# Altium PCB PCB2.PcbDoc (part 1 of 2)
Units mm, origin at the board's own origin, x right, y up, seen from the top; angles counter-clockwise.
Board outline 57.97 x 94.13 mm, 2 copper layers (Top Layer, Bottom Layer); 87 components, 62 nets, 335 pads, 103 vias.
Unrouted connection lines stored in the file: 22.
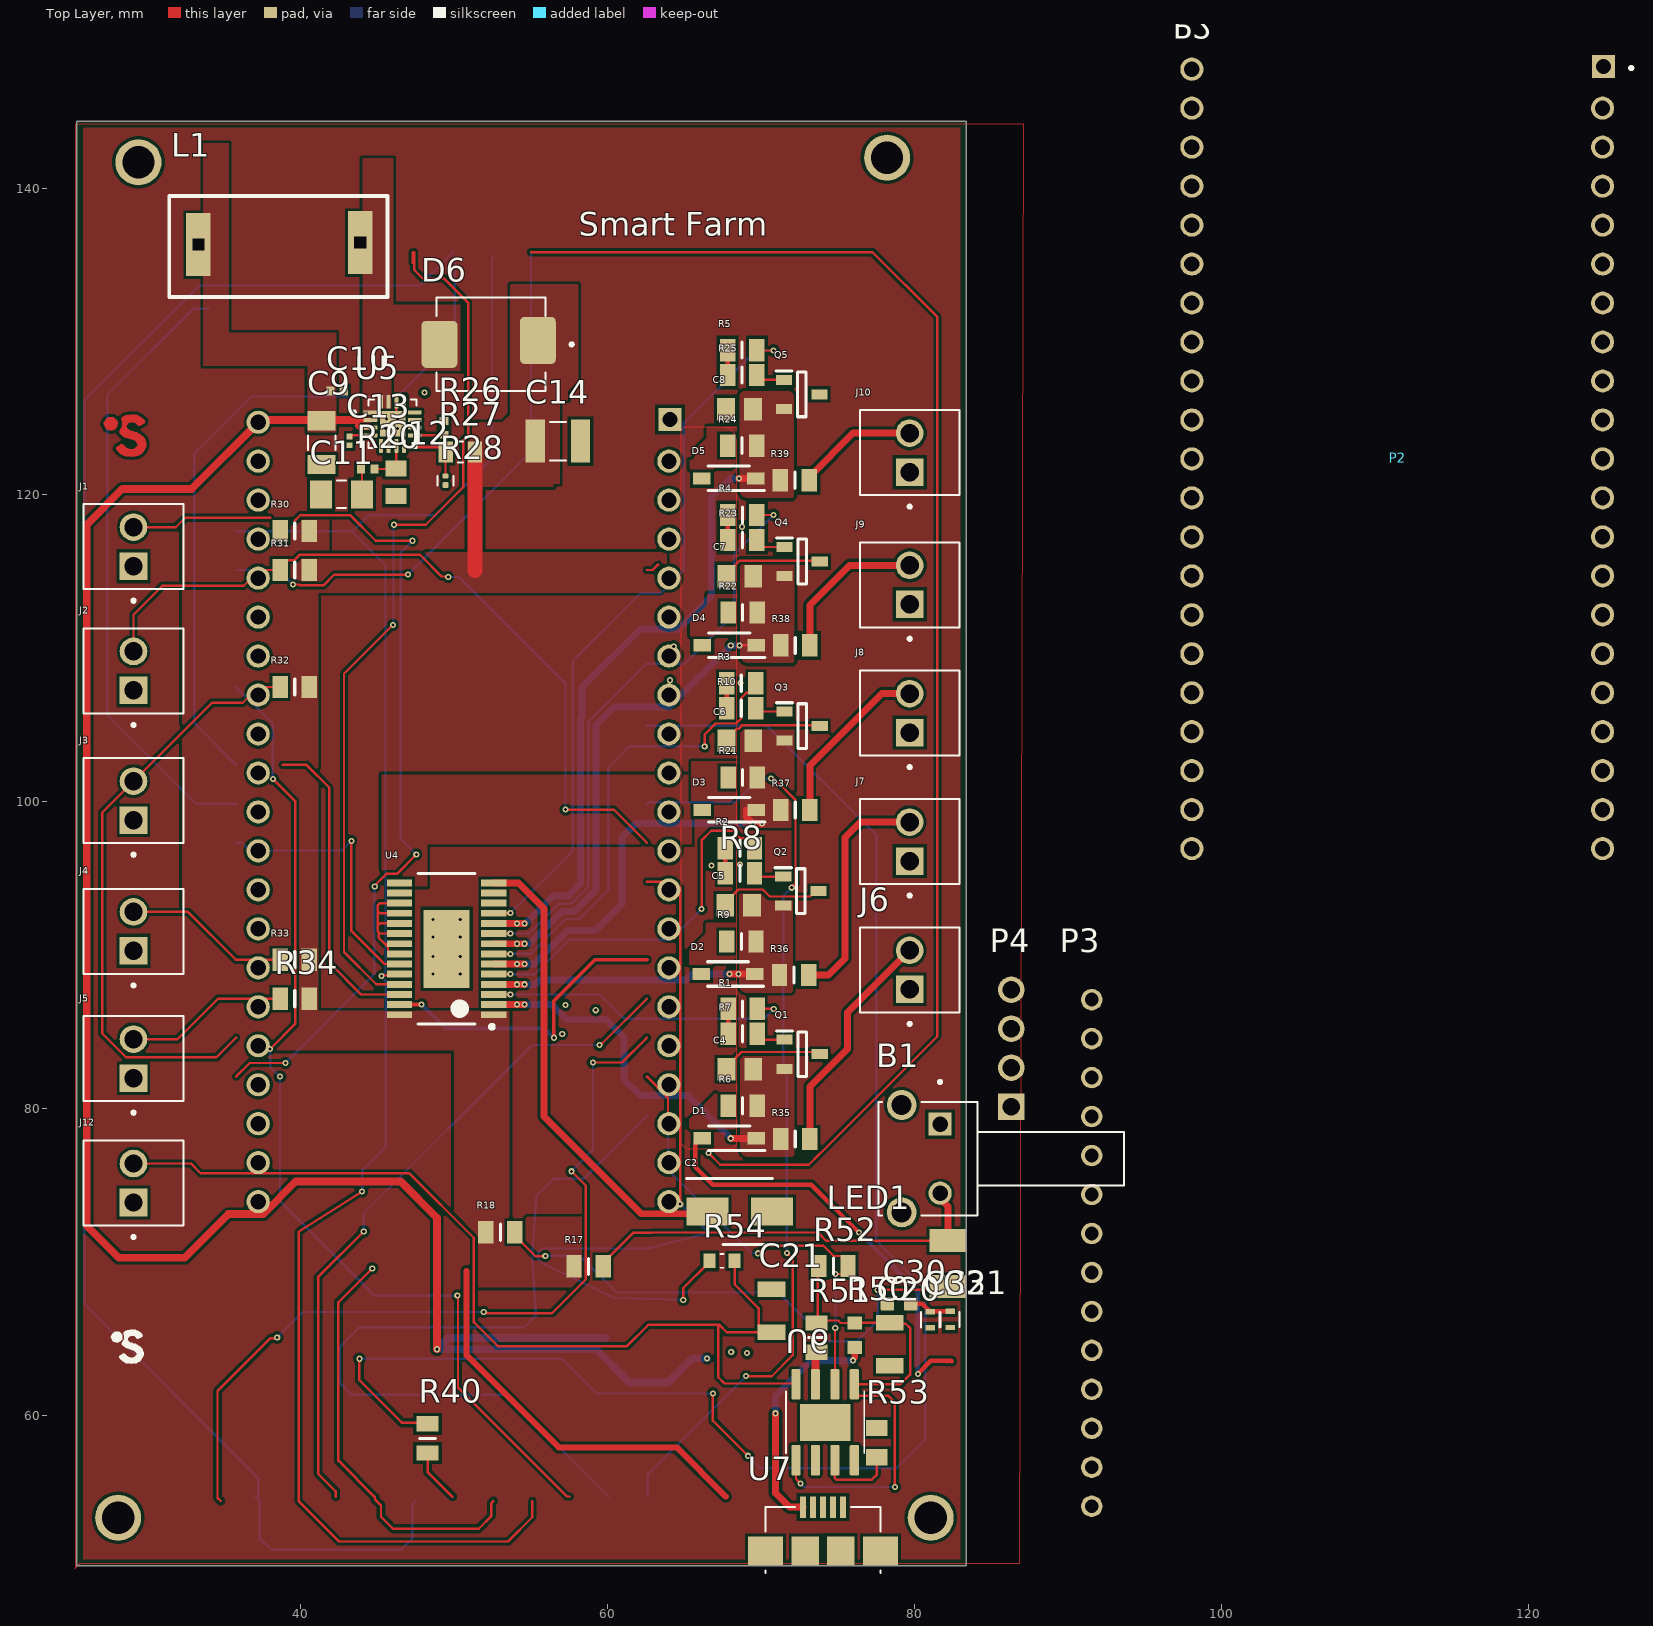
[diagram p0: Top Layer view]
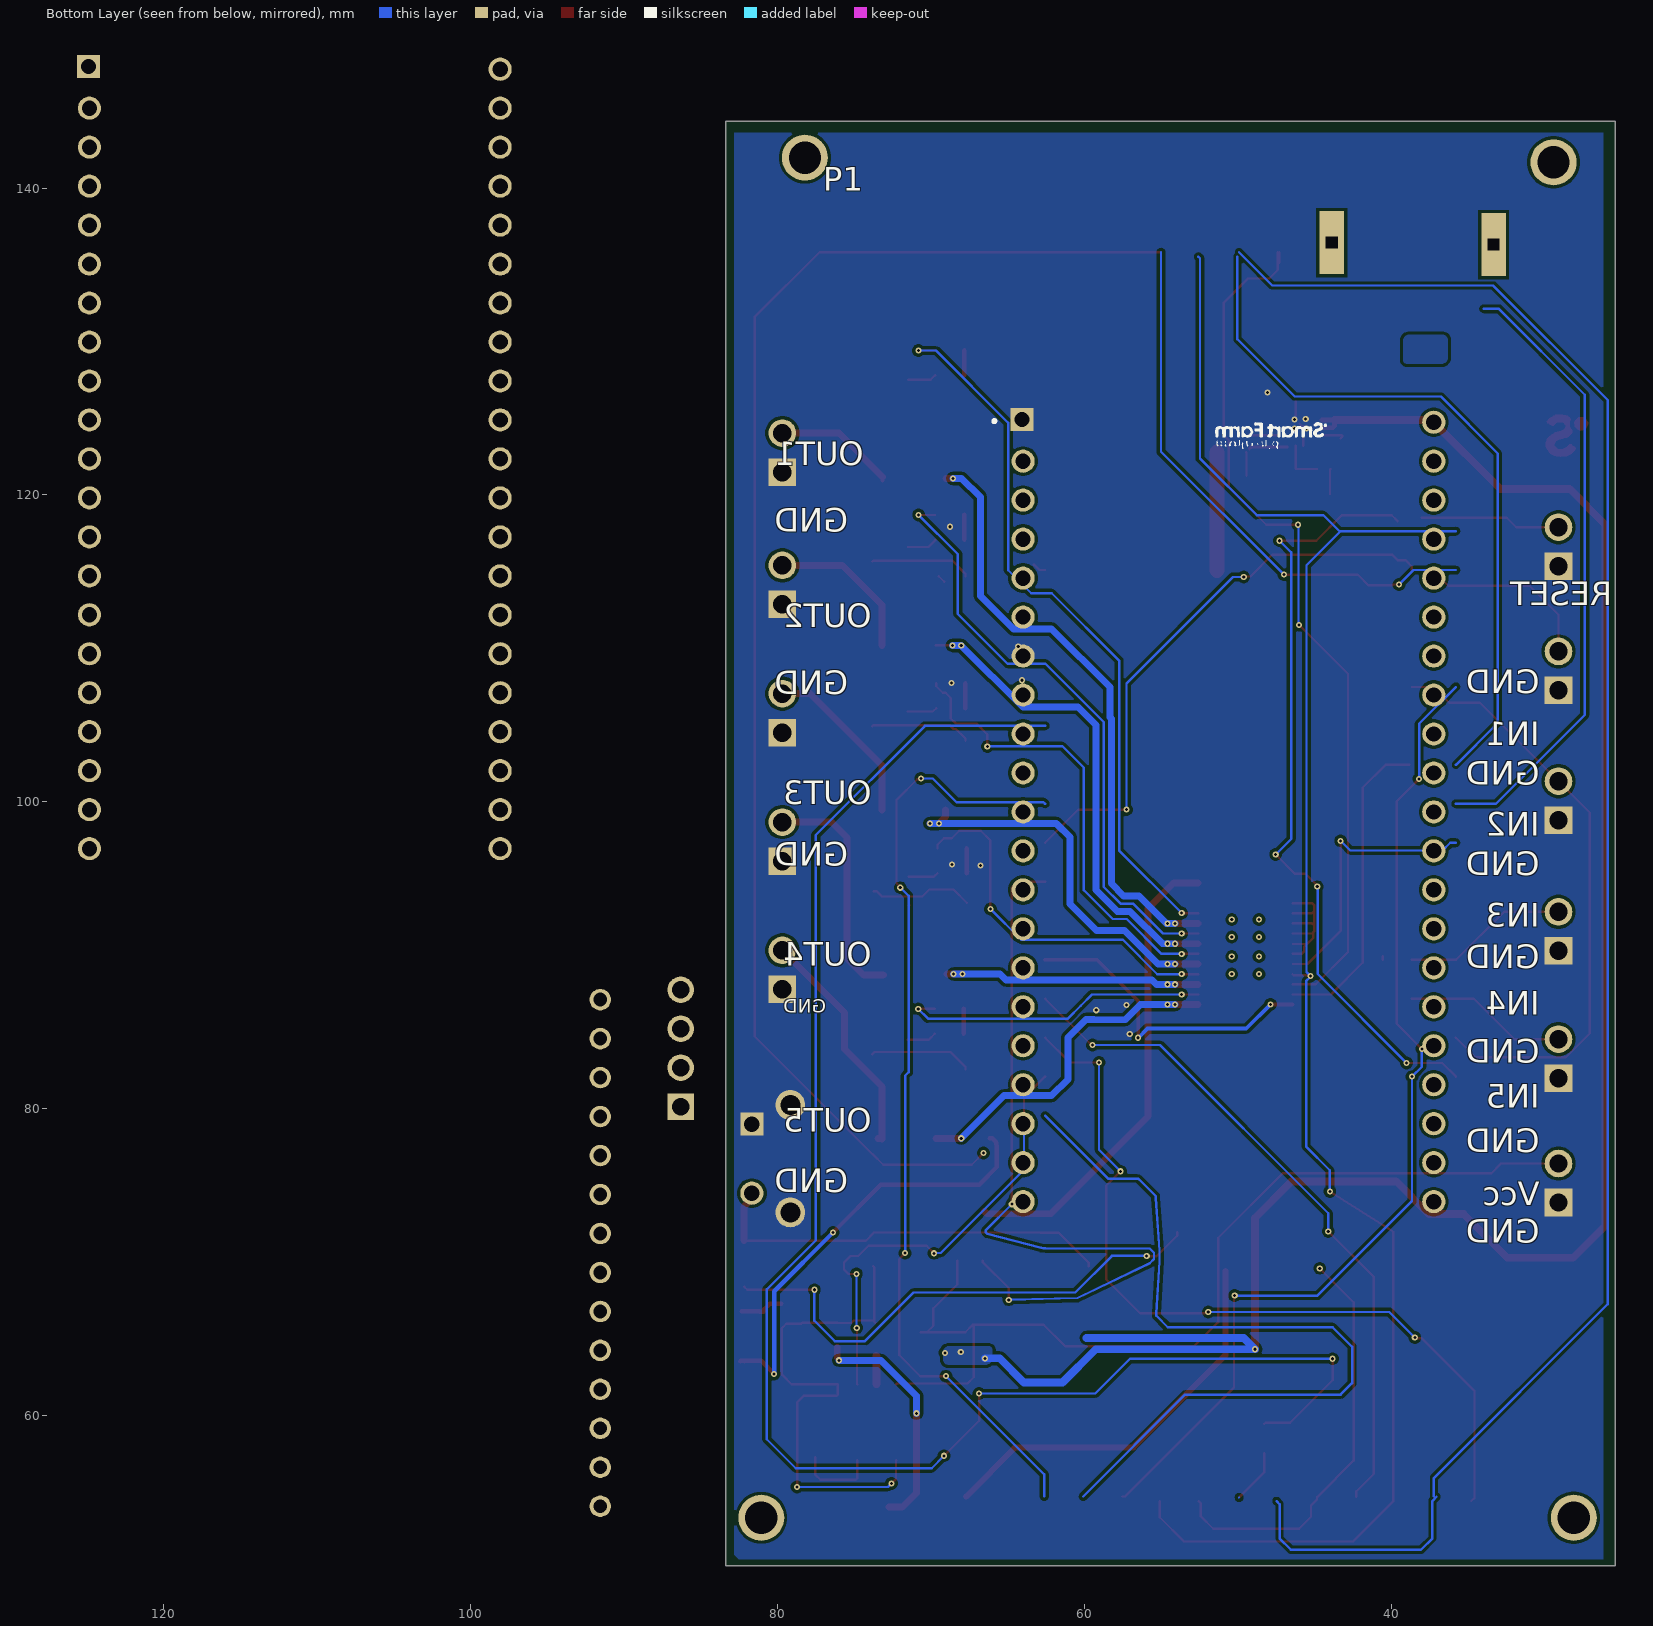
[diagram p1: Bottom Layer view, seen from below]

## Layer stack, top to bottom
Top Solder: solder mask 0.0102, Solder Resist, Dk 3.5
Top Layer: signal copper 0.0356
Dielectric 1: dielectric 0.32, FR-4, Dk 4.8
Bottom Layer: signal copper 0.0356
Bottom Solder: solder mask 0.0102, Solder Resist, Dk 3.5

## Board outline
25.4,50.216 83.375,50.216 83.375,144.348 25.4,144.348

## Design rules (kind name [scope] priority, off if disabled: settings)
BoardOutlineClearance [All] p1: gap=0.4 ignorepadtopadclearanceinfootprint=FALSE
Clearance [All] p1: gap=0.2 ignorepadtopadclearanceinfootprint=FALSE except(0.05: SMDPad-SMDPad)
PolygonConnect [All] p1: connectstyle=Direct reliefconductorwidth=0.254 reliefentries=4 polygonreliefangle="90 Angle" airgapwidth=0.254
RoutingVias [All] p1: holewidth=0.2 width=0.4 viastyle="Through Hole" minholewidth=0.2 minwidth=0.4 maxholewidth=0.2 maxwidth=0.4
SolderMaskExpansion [All] p1: expansion=0.102 istentingtop=FALSE
Width [All] p1: maxlimit=5 minlimit=0.154 preferedwidth=0.154
30 further rules are at their usual default settings.

## Classes and differential pairs
component class U_afficheur: P3 P4 R40
component class "U_circuit de boost": C9 C10 C11 C12 C13 C14 D6 L1 R20 R26 R27 R28 U5
component class U_INPUT_OUTPUT: J1 J2 J3 J4 J5 J6 J7 J8 J9 J10 R30 R31 R32 R33 R34 R35 R36 R37 R38 R39
component class U_commande: C2 C4 C5 C6 C7 C8 C30 C31 C32 D1 D2 D3 D4 D5 Q1 Q2 Q3 Q4 Q5 R1 R2 R3 R4 R5 R6 R7 R8 R9 R10 R21 R22 R23 R24 R25 U4
component class "U_circuit de charge": C20 C21 J12 R50 R51 R52 R53 R54 U6 U7
component class U_board: B1 LED1 P1 R17 R18

## Components (designator, comment, footprint, x,y, rotation, side; value= is the part's Value field where it differs from the comment)
B1 "bouton reset" "bouton reset" 101.675,52.181 r90 top
C2 "220NF" "CAP 220UF 50V" 69.613,73.812 r0 top
C4 "10NF" "CAP 10NF 50V" 67.342,83.837 r180 top
C5 "10NF" "CAP 10NF 50V" 67.26,94.545 r180 top
C6 "10NF" "CAP 10NF 50V" 67.342,105.24 r180 top
C7 "10NF" "CAP 10NF 50V" 67.342,115.98 r180 top
C8 "10NF" "CAP 10NF 50V" 67.312,126.862 r180 top
C9 "GRM31CR71E106KA12L" GRM31CR71E106KA12L 41.224,122.268 r270 top
C10 "GRM155R71A104KA01D" GRM155R71A104KA01D 42.621,126.898 r0 top
C11 "CGA5L2C0G1H683J160AD" CGA5L2C0G1H683J160AD 42.393,120.167 r180 top
C12 "GRM2195C1H152JA01D" GRM2195C1H152JA01L 47.346,121.716 r90 top
C13 "GRM033R60J223KE01D" GRM033R60J223KE01D 42.926,123.014 r270 top
C14 "GRM32EC80J107ME20L" GRM32EC80J107ME20L 57.638,123.003 r0 top
C20 "cond10uF" cond10uF 78.384,64.592 r90 top
C21 "cond10uF" cond10uF 70.663,66.878 r270 top
C30 "4.7UF" C4.7uF 78.715,67.335 r270 top
C31 "100NF" C100nF 82.118,66.04 r270 top
C32 "100NF" C100nF 80.823,66.015 r270 top
D1 "MBR130" "DIODE SKOTTY" 67.792,78.071 r180 top
D2 "MBR130" "DIODE SKOTTY" 67.71,88.78 r180 top
D3 "MBR130" "DIODE SKOTTY" 67.792,99.475 r180 top
D4 "MBR130" "DIODE SKOTTY" 67.792,110.2 r180 top
D5 "MBR130" "DIODE SKOTTY" 67.762,121.082 r180 top
D6 "B540C-13-F" B540C-13-F 52.654,129.565 r180 top
J1 "282834-2" 282834-2 28.964,116.629 r90 top
J2 "282834-2" 282834-2 28.964,108.534 r90 top
J3 "282834-2" 282834-2 28.964,100.076 r90 top
J4 "282834-2" 282834-2 28.964,91.559 r90 top
J5 "282834-2" 282834-2 28.964,83.261 r90 top
J6 "282834-2" 282834-2 79.553,89.052 r90 top
J7 "282834-2" 282834-2 79.553,97.409 r90 top
J8 "282834-2" 282834-2 79.553,105.783 r90 top
J9 "282834-2" 282834-2 79.553,114.148 r90 top
J10 "282834-2" 282834-2 79.553,122.758 r90 top
J12 "282834-2" 282834-2 28.964,75.159 r90 top
L1 "NPI31P2R7MTRF" NPI31P2R7MTRF 34.595,131.496 r0 top
LED1 "led green" "led green" 79.791,69.624 r90 top
P1 "21 femelle" "pin 21 femelle"#1 51.029,95.25 r180 bottom
P2 "21 femelle" "pin 21 femelle"#2 111.879,118.259 r180 top
P3 "pin 14 femelle" "pin 14 demelle" 92.685,64.973 r90 top
P4 "pin 4 male" "pin 4 male" 86.411,81.585 r90 top
Q1 "FDN335N" FDN335N 73.051,83.424 r0 top
Q2 "FDN335N" FDN335N 72.969,94.053 r0 top
Q3 "FDN335N" FDN335N 73.051,104.809 r0 top
Q4 "FDN335N" FDN335N 73.051,115.534 r0 top
Q5 "FDN335N" FDN335N 73.021,126.433 r0 top
R1 "220" "RES 220" 67.143,86.509 r180 top
R2 "220" "RES 220" 66.969,96.976 r180 top
R3 "220" "RES 220" 67.051,107.733 r180 top
R4 "220" "RES 220" 67.119,118.7 r180 top
R5 "220" "RES 220" 67.113,129.44 r180 top
R6 "10K" RES_10K 549.362,105.973 r0 top
R7 "220" "RES 220" 67.143,84.882 r180 top
R8 "220" "RES 220" 66.969,95.35 r180 top
R9 "10K" RES_10K 549.28,116.681 r0 top
R10 "220" "RES 220" 67.051,106.106 r180 top
R17 "RES_10K" RES_10K -421.818,43.944 r180 top
R18 "res 220" "RES 220" 51.349,71.95 r180 top
R20 "CRCW04021K37FKED" CRCW04021K37FKED 43.727,121.818 r180 top
R21 "10K" RES_10K 549.362,127.376 r0 top
R22 "10K" RES_10K 549.362,138.116 r0 top
R23 "220" "RES 220" 67.119,117.073 r180 top
R24 "10K" RES_10K 549.332,148.998 r0 top
R25 "220" "RES 220" 67.113,127.813 r180 top
R26 "CRCW040260K4FKED" CRCW040260K4FKED 49.708,124.499 r90 top
R27 "RT0805BRD0730K5L" RT0805BRD0730K5L 49.38,122.796 r180 top
R28 "RC0201FR-0710KL" RC0201FR-0710KL 49.428,119.406 r270 top
R30 "RES_10K" RES_10K 520.168,143.431 r0 top
R31 "RES_10K" RES_10K 520.168,140.891 r0 top
R32 "RES_10K" RES_10K 520.168,133.271 r0 top
R33 "RES_10K" RES_10K 520.168,115.491 r0 top
R34 "RES_10K" RES_10K 520.168,112.951 r0 top
R35 "res 220" "RES 220" 70.572,78.024 r180 top
R36 "res 220" "RES 220" 70.49,88.719 r180 top
R37 "res 220" "RES 220" 70.572,99.475 r180 top
R38 "res 220" "RES 220" 70.572,110.2 r180 top
R39 "res 220" "RES 220" 70.542,120.955 r180 top
R40 "res 220" "res 220" 48.26,60.162 r90 top
R50 "" res0.4 82.152,8.563 r90 top
R51 "" "res 1k" 75.387,68.133 r270 top
R52 "" "res 1k" 71.664,71.526 r0 top
R53 "res1.2k" res1.2k 77.546,58.522 r270 top
R54 "resis7.5k" resis7.5k 67.437,69.875 r0 top
U4 "A3944KLPTR-T" SOP65P640X265_HS-29N 49.5,90.423 r180 top
U5 "TPS55340RTER" TPS55340RTER 46.863,124.638 r0 top
U6 "TP 4056" TP4056 74.549,59.436 r90 top
U7 "" USB 74.415,51.181 r0 top

## Footprints (in the part's own frame and the unit in brackets; to place one, negate y for a bottom-side part, rotate by r counter-clockwise, add the part's x,y. Pads: shape width x height; smd on the part's side, far side on the other; paste and mask are expansions set on the pad)
282834-2 [mm]
  rect 1.8x1.8 / inner round 1.8 / far side rect 1.8x1.8 hole 1.2: 1(-1.27,-0.127)
  round 1.8 hole 1.2: 2(1.27,-0.127)
  silkscreen extent -3.62,-3.38 2.77,3.12, body extent -2.77,-3.38 2.77,3.12, height 10
B540C-13-F [mm]
  rrect25% 2.33x3.07 smd: 1(-2.794,-0.508) 2(3.619,-0.254)
  silkscreen extent -5.1,-3.3 3.8,2.8, body extent -3.46,-3.42 4.48,2.48, height 2.5
"bouton reset" [mm]
  rect 1.508x1.508 / inner round 1.508 / far side rect 1.508x1.508 hole 1: 1(26.813,20.014)
  round 1.508 hole 1: 2(22.313,20.014)
  round 1.95 hole 1.3: 3(28.063,22.514) 4(21.063,22.514)
  silkscreen extent 20.86,8.01 29.66,24.01, body extent 20.47,9.57 28.78,24.43, height 6.1
C4.7uF [mil]
  rrect25% 35x35 smd: 1(1.97,40.83) 2(1.97,-19.17)
  body extent -16,-20 20,43, height 31
C100nF [mm]
  rect 0.35x0.6 smd: 1(-0.749,0.2) 2(0.301,0.2)
  silkscreen extent -0.72,-0.41 0.28,0.82, body extent -0.72,-0.08 0.28,0.47, height 0.5
"CAP 10NF 50V" [mm]
  rect 1.17x1.47 smd: 1(-2.141,1.27) 2(-0.399,1.27)
  body extent -2.27,0.51 -0.27,1.96, height 1.26
"CAP 220UF 50V" [mm]
  rect 2.75x1.85 smd: 1(-3.116,-0.508) 2(1.084,-0.508)
  silkscreen extent -4.49,-2.66 1.13,1.64, body extent -4.02,-2.76 1.48,1.74, height 5.5
CGA5L2C0G1H683J160AD [mm]
  rect 1.44x1.82 smd: 1(-1.59,0.127) 2(1.082,0.127)
  silkscreen extent -0.54,-0.77 0.04,1.03, body extent -1.85,-0.67 1.35,0.93, height 1.9
cond10uF [mm]
  rect 1.02x1.82 smd: 1(-1.348,0.006) 2(1.452,0.006)
  body extent -1.68,-0.79 1.52,0.81, height 1.78
CRCW04021K37FKED [mm]
  rect 0.51x0.6 smd: 1(-1.08,0.127) 2(-0.19,0.127)
  body extent -1.13,-0.12 -0.14,0.38, height 0.4
CRCW040260K4FKED [mm]
  rect 0.51x0.6 smd: 1(-0.572,0.381) 2(0.318,0.381)
  body extent -0.63,0.13 0.37,0.63, height 0.4
"DIODE SKOTTY" [mm]
  rect 1.15x0.8 smd: 1(-1.877,0) 2(1.623,0)
  silkscreen extent -2.45,-0.8 1.22,0.8, body extent -1.86,-0.8 1.86,0.8, height 1.35
FDN335N [mm]
  rect 1.05x0.65 smd: 1(-1.531,1.077) 2(-1.531,-0.823) 3(0.769,0.127)
  silkscreen extent -2.06,-1.33 -0.11,1.65, body extent -1.64,-1.33 0.87,1.59, height 1.12
GRM31CR71E106KA12L [mm]
  rect 1.25x1.82 smd: 1(-2.573,0.127) 2(0.287,0.127)
  silkscreen extent -1.62,-0.77 -0.66,1.03, body extent -2.74,-0.67 0.46,0.93, height 1.8
GRM32EC80J107ME20L [mm]
  rect 1.25x2.81 smd: 1(-2.368,0.508) 2(0.59,0.508)
  silkscreen extent -1.42,-0.74 -0.36,1.76, body extent -2.49,-0.74 0.71,1.76, height 2.2
GRM033R60J223KE01D [mm]
  rect 0.38x0.4 smd: 1(-0.789,0.254) 2(-0.227,0.254)
  body extent -0.81,0.08 -0.21,0.38, height 0.33
GRM155R71A104KA01D [mm]
  rect 0.54x0.6 smd: 1(-0.686,-0.127) 2(0.178,-0.127)
  body extent -0.75,-0.37 0.25,0.13, height 0.55
GRM2195C1H152JA01L [mm]
  rect 1.05x1.38 smd: 1(-1.777,1.143) 2(-0.001,1.143)
  body extent -1.89,0.39 0.11,1.64, height 0.95
"led green" [mm]
  rect 1.5x2.4 smd: A(-1.225,-2.378) C(1.775,-2.378)
  body extent -1.47,-5.93 2.53,3.37, height 5.54
NPI31P2R7MTRF [mil]
  rect 62.99x161.42 hole 30 square: 1(-50,190) 2(365,195)
  silkscreen extent -125,55 435,315, body extent -105,-5 415,385, height 252
"pin 4 male" [mm]
  rect 1.725x1.725 / inner round 1.594 / far side rect 1.725x1.725 hole 1.15: 1(-1.451,0.108)
  round 1.725 hole 1.15: 2(1.089,0.108) 3(3.629,0.108) 4(6.169,0.108)
  body extent -2.59,-0.98 7.57,1.51, height 7.37
"pin 14 demelle" [mm]
  round 1.4 hole 0.9: 1(-10.885,1.139) 2(-8.345,1.139) 3(-5.805,1.139) 4(-3.265,1.139) 5(-0.725,1.139) 6(1.815,1.139) 7(4.355,1.139) 8(6.895,1.139) 9(9.435,1.139) 10(11.975,1.139) 11(14.515,1.139) 12(17.055,1.139) 13(19.595,1.139) 14(22.135,1.139)
  body extent -12.28,-0.13 23.28,2.41, height 8.06
"pin 21 femelle"#1 [mm]
  rect 1.508x1.508 hole 1: 1(-13.025,29.673)
  round 1.508 hole 1: 2(-12.96,26.953) 3(-12.96,24.413) 4(-12.96,21.873) 5(-12.96,19.333) 6(-12.96,16.793) 7(-12.96,14.253) 8(-12.96,11.713) 9(-12.96,9.173) 10(-12.96,6.633) 11(-12.96,4.093) 12(-12.96,1.553) 13(-12.96,-0.987) 14(-12.96,-3.527) 15(-12.96,-6.067) 16(-12.96,-8.607) 17(-12.96,-11.147) 18(-12.96,-13.687) 19(-12.96,-16.227) 20(-12.96,-18.767) 21(-12.96,-21.307) 22(13.81,-21.307) 23(13.81,-18.767) 24(13.81,-16.227) 25(13.81,-13.687) 26(13.81,-11.147) 27(13.81,-8.607) 28(13.81,-6.067) 29(13.81,-3.527) 30(13.81,-0.987) 31(13.81,1.553) 32(13.81,4.093) 33(13.81,6.633) 34(13.81,9.173) 35(13.81,11.713) 36(13.81,14.253) 37(13.81,16.793) 38(13.81,19.333) 39(13.81,21.873) 40(13.81,24.413) 41(13.81,26.953) 42(13.81,29.493)
  silkscreen extent -14.93,29.47 -14.73,29.67, body extent -14.42,-22.66 15.3,30.77, height 5.08
"pin 21 femelle"#2 [mm]
  rect 1.508x1.508 hole 1: 1(-13.025,-29.673)
  round 1.508 hole 1: 2(-12.96,-26.953) 3(-12.96,-24.413) 4(-12.96,-21.873) 5(-12.96,-19.333) 6(-12.96,-16.793) 7(-12.96,-14.253) 8(-12.96,-11.713) 9(-12.96,-9.173) 10(-12.96,-6.633) 11(-12.96,-4.093) 12(-12.96,-1.553) 13(-12.96,0.987) 14(-12.96,3.527) 15(-12.96,6.067) 16(-12.96,8.607) 17(-12.96,11.147) 18(-12.96,13.687) 19(-12.96,16.227) 20(-12.96,18.767) 21(-12.96,21.307) 22(13.81,21.307) 23(13.81,18.767) 24(13.81,16.227) 25(13.81,13.687) 26(13.81,11.147) 27(13.81,8.607) 28(13.81,6.067) 29(13.81,3.527) 30(13.81,0.987) 31(13.81,-1.553) 32(13.81,-4.093) 33(13.81,-6.633) 34(13.81,-9.173) 35(13.81,-11.713) 36(13.81,-14.253) 37(13.81,-16.793) 38(13.81,-19.333) 39(13.81,-21.873) 40(13.81,-24.413) 41(13.81,-26.953) 42(13.81,-29.493)
  silkscreen extent -14.93,-29.67 -14.73,-29.47, body extent -14.42,-30.77 15.3,22.66, height 5.08
RC0201FR-0710KL [mm]
  rrect50% 0.33x0.4 smd: 1(-1.829,0)
  rrect50% 0.38x0.4 smd: 2(-1.244,0)
  silkscreen extent -1.82,-0.52 -1.22,0.52, body extent -1.82,-0.15 -1.22,0.15, height 0.26
res0.4 [mm]
  rect 0.85x0.95 smd: 1(55.877,6.054) 2(57.477,6.054)
  body extent 55.88,5.65 57.48,6.45, height 0.6
res1.2k [mm]
  rect 1.05x1.4 smd: 1(-0.665,-0.002) 2(1.235,-0.002)
  body extent -0.71,-0.63 1.29,0.62, height 0.6
"res 1k" [mm]
  rect 1x1.45 smd: 1(2.098,-1.778) 2(3.998,-1.778)
  silkscreen extent 3.05,-2.3 3.05,-1.25, body extent 2.05,-2.4 4.05,-1.15, height 0.6
"RES 220" [mm]
  rect 1x1.45 smd: 1(-2.601,0) 2(-0.701,0)
  silkscreen extent -1.65,-0.53 -1.65,0.53, body extent -2.65,-0.63 -0.65,0.63, height 0.6
"res 220" [mm]
  rect 1x1.45 smd: 1(-2.601,0) 2(-0.701,0)
  silkscreen extent -1.65,-0.53 -1.65,0.53, body extent -2.65,-0.63 -0.65,0.63, height 0.6
RES_10K [mm]
  rect 1x1.45 smd: 1(-481.518,-25.781) 2(-479.618,-25.781)
  silkscreen extent -480.57,-26.31 -480.57,-25.26, body extent -481.57,-26.41 -479.57,-25.16, height 0.6
resis7.5k [mm]
  rect 0.79x0.93 smd: 1(-0.81,0.208) 2(0.83,0.208)
  silkscreen extent -0.1,-0.24 0.12,0.66, body extent -0.75,-0.23 0.85,0.57, height 0.45
RT0805BRD0730K5L [mm]
  rect 0.92x1.38 smd: 1(-1.971,0) 2(-0.061,0)
  silkscreen extent -1.19,-0.68 -0.85,0.68, body extent -2.02,-0.63 -0.02,0.63, height 0.6
SOP65P640X265_HS-29N [mm] "SOP, 28-Leads, Body 9,70x4,40mm, Pitch 0,65mm, Thermal Pad 5,08x3,00mm, IPC Medium Density"
  rect 1.65x0.45 smd: 1(-3.075,4.3) 2(-3.075,3.638) 3(-3.075,2.977) 4(-3.075,2.315) 5(-3.075,1.654) 6(-3.075,0.992) 7(-3.075,0.331) 8(-3.075,-0.331) 9(-3.075,-0.992) 10(-3.075,-1.654) 11(-3.075,-2.315) 12(-3.075,-2.977) 13(-3.075,-3.638) 14(-3.075,-4.3) 15(3.075,-4.3) 16(3.075,-3.638) 17(3.075,-2.977) 18(3.075,-2.315) 19(3.075,-1.654) 20(3.075,-0.992) 21(3.075,-0.331) 22(3.075,0.331) 23(3.075,0.992) 24(3.075,1.654) 25(3.075,2.315) 26(3.075,2.977) 27(3.075,3.638) 28(3.075,4.3)
  rect 3x5.08 smd: 29(0,0)
  silkscreen extent -3.08,-4.9 1.85,5.2, body extent -3.2,-4.9 3.2,4.9, height 2.65
TP4056 [mm]
  rrect25% 1.97x0.6 smd: 1(-2.348,-1.524) 2(-2.348,-0.254) 3(-2.348,1.016) 4(-2.348,2.286) 5(2.602,2.286) 6(2.602,1.016) 7(2.602,-0.254) 8(2.602,-1.524)
  rect 2.413x3.302 smd paste-3: 9(0.127,0.381)
  silkscreen extent -1.87,-2.17 2.13,2.93, body extent -2.87,-2.07 3.13,2.83, height 1.75
TPS55340RTER [mm]
  rrect25% 0.89x0.26 smd: 1(-2.329,0.75) 2(-2.329,0.25) 3(-2.329,-0.25) 4(-2.329,-0.75) 9(0.551,-0.75) 10(0.551,-0.25) 11(0.551,0.25) 12(0.551,0.75)
  rrect25% 0.26x0.89 smd: 5(-1.639,-1.44) 6(-1.139,-1.44) 7(-0.639,-1.44) 8(-0.139,-1.44) 13(-0.139,1.44) 14(-0.639,1.44) 15(-1.139,1.44) 16(-1.639,1.44)
  rect 1.66x1.66 smd paste-0.31: 17(-0.889,0)
  silkscreen extent -3.52,-1.58 0.69,1.58, body extent -2.39,-1.5 0.61,1.5, height 0.8
USB [mm]
  rect 0.4x1.4 smd: 1(-1.681,2.85) 2(-1.031,2.85) 3(-0.381,2.85) 4(0.269,2.85) 5(0.919,2.85)
  rect 2.3x1.9 smd: SH1(-4.131,0) SH4(3.369,0)
  rect 1.8x1.9 smd: SH2(-1.531,0) SH3(0.769,0)
  silkscreen extent -4.13,-1.45 3.37,2.85, body extent -4.42,-2.41 3.66,3.16, height 2.77

## Part data
B1: Mfr="CUI Devices", Mfr Réf=TS11-674-120-BK-260-RA-D, Supplier=DigiKey, Supplier réf=2223-TS11-674-120-BK-260-RA-D-ND
C2: library part CAPA_Dup1, "Aluminium Electrolytic Capacitors - SMD 50volts 0.22uF AEC-Q200", Mfr=Nichicon, Mfr Réf=UWP1HR22MCL1GB, Price=0.63$, Supplier=Mouser, Supplier réf=647-UWP1HR22MCL
C4 C7 C8: library part CAPA_Dup1, "10000 pF ±10% 50V Ceramic Capacitor X7R 0402 (1005 Metric)", Manufacturer1=SAMSUNG, Manufacturer2=MURATA, Manufacturer3=KEMET, Manufacturer5=YAGEO, Manufacturer7=TDK, Manufacturer9=PHYCOMP, Manufacturer Ref1=CL05B103KB5NNND, Manufacturer Ref2=GRM155R71H103KA88D, Manufacturer Ref3=C0402C103K5RACTU, Manufacturer Ref4=CL05B103KB5VPNC, Manufacturer Ref5=CC0402KRX7R9BB103, Manufacturer Ref6=GCM155R71H103KA55D, Manufacturer Ref7=CGA2B3X7R1H103K050BB, Manufacturer Ref8=CL05B103KB5NNNC, Manufacturer Ref9="2238 587 15636'", Mfr="Murata Electronics", Part Number=AY15800014, Tolerance=10%, Voltage=50V, Annual Usage="63 251 069", ARDIA PN=11-1522-01, Description1="C SMD X7R 0402 10nF 50V 10%", Description2=-55/125C, Family=C_COMMON, Housing=0402, Manufacturer4=SAMSUNG, Manufacturer6=MURATA, Manufacturer8=SAMSUNG, Mfr Réf=GRM155R71H103KA88D, OptionFab="/RoHS/260 /0   /0", Packing=PCE, Part Order Code=AY15800014, Part_Type=CAP_0402, PcbFootprint Height=0,55, PcbFootprint length=1,7, PcbFootprint Pdf=https://view.actiacity.com/alfresco/webdav/CAD_Elec/PCB_footprint_PDF/CNC/S0402%23A.pdf, PcbFootprint Width=0,6, Standard Price=0, Status=20, Stock="8 686 433", Supplier=DigiKey, Supplier réf=490-4516-6-ND, Supply family=CAP, Type=CERAMIC
  C7 C8: Devise=EUR, Not For New Design=0, PcbFootprint PinNumber=2, PcbFootprint Pitch=1,05, PcbFootprint Type=SMD, Standard Price Devise=0, TypeFab=SMD1
C5 C6: library part CAPA_Dup1, "10000 pF ±10% 50V Ceramic Capacitor X7R 0402 (1005 Metric)", Mfr="Murata Electronics", Mfr Réf=GRM155R71H103KA88D, Supplier=DigiKey, Supplier réf=490-4516-6-ND
  C6: Price=0.10$
C9: "Multilayer Ceramic Capacitors MLCC - SMD/SMT 10 uF 25 VDC 10% 1206 X7R", Mfr=MuRata, Mfr Réf=GRM31CR71E106KA12L, Price=0.29$, Supplier=Mouser, Supplier réf=81-GRM31CR71E106KA12
C10: "Multilayer Ceramic Capacitors MLCC - SMD/SMT 0.1 uF 10 VDC 10% 0402 X7R", Mfr=Murata, Mfr Réf=GRM155R71A104KA01D, Price=0.09$, Supplier=mouser, Supplier réf=81-GRM155R71A104KA1D
C11: "Multilayer Ceramic Capacitors MLCC - SMD/SMT 1206 50V 0.068uF C0G 5% AEC-Q200 EPXY", Mfr=TDK, Mfr Réf=CGA5L2C0G1H683J160AD, Price=0.73$, Supplier=mouser, Supplier réf=810-CGA5L2C0G1H683JD
C12: "Multilayer Ceramic Capacitors MLCC - SMD/SMT 10 uF 25 VDC 10% 1206 X7R", Mfr=MuRata, Mfr Réf=GRM31CR71E106KA12L, Price=0.29$, Supplier=mouser, Supplier réf=490-6518-6-ND
C13: "Multilayer Ceramic Capacitors MLCC - SMD/SMT 0.022 uF 6.3 VDC 10% 0201 X5R", Mfr=MuRata, Mfr Réf=GRM033R60J223KE01D, Price=0.09$, Supplier=Mouser, Supplier réf=81-GRM033R60J223KE1D
C14: "Multilayer Ceramic Capacitors MLCC - SMD/SMT 100 uF 6.3 VDC 20% 1210 X6S", Mfr="Murata Electronics", Mfr Réf=GRM32EC80J107ME20L, Price=1.33$, Supplier=Mouser, Supplier réf=81-GRM32EC80J107ME0L
C20: "Multilayer Ceramic Capacitors MLCC - SMD/SMT 16V 10uF X7R 1206 10% AEC-Q200", Mfr="KYOCERA AVX", Mfr Réf=KAM31GR71C106KU, Supplier=Mouser, Suuplier réf=581-KAM31GR71C106KU
C30: library part CAPA_Dup1, Manufacturer1=SAMSUNG, Manufacturer2=AVX, Manufacturer3="TAIYO YUDE", Manufacturer6=TDK, Manufacturer8=WALSIN, Manufacturer9=YAGEO, Manufacturer Ref1=CL21A475KAQNNNE, Manufacturer Ref2=08053D475KAT2A, Manufacturer Ref3=TMK212ABJ475KG-T, Manufacturer Ref4=TMK212AB7475KG-T, Manufacturer Ref5=TMK212BBJ475KGHT, Manufacturer Ref6=CGA4J3X5R1E475K125AB, Manufacturer Ref7=CGA4J3X5R1V475K125AB, Manufacturer Ref8=0805X475K100CT, Manufacturer Ref9=CC0805KKX7R8BB475, Manufacturer Ref10=CL21A475KAQNNNG, Part Number=AY15510021, Tolerance=10%, Voltage=25V, Annual Usage="2 324 678", ARDIA PN=11-1504-01, Description1="C SMD X5R 0805 4.7uF 25V 10%", Devise=EUR, Family=C_COMMON, Housing=0805, Manufacturer4="TAIYO YUDE", Manufacturer5="TAIYO YUDE", Manufacturer7=TDK, Manufacturer10=SAMSUNG, Not For New Design=0, OptionFab="/SPb /260 /1   /0", Packing=PCE, Part Order Code=AY15510021, Part_Type=CAP_0805, PcbFootprint Height=0,95, PcbFootprint length=3, PcbFootprint Pdf=https://view.actiacity.com/alfresco/webdav/CAD_Elec/PCB_footprint_PDF/CNC/S0805R%23A.pdf, PcbFootprint PinNumber=2, PcbFootprint Pitch=1,8, PcbFootprint Type=SMD, PcbFootprint Width=1,6, Specification="estimation Clef a confirmer", Standard Price=0, Standard Price Devise=0, Status=20, Stock="72 862", Supply family=CAP, Type=CERAMIC, TypeFab=SMD1
C31 C32: library part CAPA_Dup1, Manufacturer1=YAGEO, Manufacturer2=MURATA, Manufacturer4=KEMET, Manufacturer5="TAIYO YUDE", Manufacturer8=TDK, Manufacturer10=SAMSUNG, Manufacturer Ref1=CC0603KRX7R8BB104, Manufacturer Ref2=GRM188R71E104KA01D, Manufacturer Ref3=GRM188R71E104KA01J, Manufacturer Ref4=C0603C104K5RAC7411, Manufacturer Ref5=TMF107B7104KAHT, Manufacturer Ref6=TMK107B7104KAHT, Manufacturer Ref7=HMK107B7104KA-T, Manufacturer Ref8=CGA3E2X7R1E104K080AA, Manufacturer Ref9=C0603T104K3RACTU, Manufacturer Ref10=CL10B104KA85PNC, Part Number=AY15620002, Tolerance=10%, Voltage=25V, Annual Usage="12 962 659", ARDIA PN=11-1525-01, Description1="C SMD X7R 0603 100nF 25V 10%", Devise=EUR, Family=C_COMMON, Housing=0603, Manufacturer3=MURATA, Manufacturer6="TAIYO YUDE", Manufacturer7="TAIYO YUDE", Manufacturer9=KEMET, Not For New Design=0, OptionFab="/RoHS/260 /0   /0", Packing=PCE, Part Order Code=AY15620002, Part_Type=CAP_0603, PcbFootprint Height=1, PcbFootprint length=2,3, PcbFootprint Pdf=https://view.actiacity.com/alfresco/webdav/CAD_Elec/PCB_footprint_PDF/CNC/S0603R%23A.pdf, PcbFootprint PinNumber=2, PcbFootprint Pitch=1,38, PcbFootprint Type=SMD, PcbFootprint Width=1,1, Specification="02/07/03 FOOTPRINT : S0603  DEVIENT  S0603R**************ATTENTION COMPOSANT AERONAUTIQUE**************         AJOUT REF FAB  TDK : C1608 X7R1H104 KT         AJOUT REF FAB  SAMSUNG : CL10B104KBNC*   CES COMPOSANTS DOIVENT ETRE LIVRES ACCOMPAGNES D''UN", Standard Price=0, Standard Price Devise=0, Status=20, Stock="107 520", Supply family=CAP, Type=CERAMIC, TypeFab=SMD1
D1 D2 D3 D4 D5: library part DIODE_SCHOT, "Schottky Diodes & Rectifiers 1A 30V", Mfr=onsemi, Mfr Réf=MBR130T1G, Supplier=Mouser, Supplier réf=863-MBR130T1G
  D1: Price=0.31$
D6: "Schottky Diodes & Rectifiers 40V 5A", Mfr="Diodes Incorporated", Mfr Réf=B540C-13-F, Price=0.43$, Supplier=Mouser, Supplier réf=621-B540C-F
J1 J2 J3 J4 J5 J6 J7 J8 J9 J10: "Fixed Terminal Blocks 2P SIDE ENTRY 2.54mm", Mfr="TE Connectivity", Mfr Réf=282834-2, Supplier=Mouser, Supplier réf=571-282834-2
L1: "Power Inductor (SMD), 2.7 uH, ± 20%, 6.6 A, Unshielded, 7 A, 13.2mm x 9.9mm x 6.4mm", Mfr=NIC, Mfr Réf=NPI31P2R7MTRF, Price=0.37$, Supplier="Exshine Technology", Supplier réf=EX-NPI31P2R7MTRF
LED1: Mfr="Lumex Opto/Components Inc.", Mfr Réf=SSF-LXH305GD-TR, Supplier=DigiKey, Supplier réf=67-1375-6-ND
Q1 Q2 Q3 Q4 Q5: library part "MOSFET N", "MOSFET SSOT-3 N-CH 20V", Mfr="onsemi / Fairchild", Mfr Réf=FDN335N, Supplier=Mouser, Supplier réf=512-FDN335N
  Q1: Price=0.40$
R1 R2 R3 R4 R5 R7 R8 R10 R23 R25: library part RE, "Thick Film Resistors - SMD 1/2watt 220ohms 1% High Power AEC-Q200", Mfr="Vishay / Dale", Mfr Réf=CRCW0805220RFKEAHP, Supplier=Mouser, Supplier réf=71-CRCW0805220RFKEAH
R6 R9 R21 R22 R24: library part RE, "Thick Film Resistors - SMD ResHighPowerA 0805 10k 1% 1/2W TC100", Mfr=Bourns, Mfr Réf=CMP0805AFX-1002ELF, Supplier=Mouser, Supplier réf=652-CMP0805AFX-1002L
R17: "Thick Film Resistors - SMD ResHighPowerA 0805 10k 1% 1/2W TC100", Mfr="Bourns Inc.", Mfr Réf=CMP0805AFX-1002ELF, Supplier=Mouser, Supplier réf=652-CMP0805AFX-1002L
R18: "Thick Film Resistors - SMD 1/2watt 220ohms 1% High Power AEC-Q200", Mfr="Vishay Dale", Mfr Réf=CRCW0805220RFKEAHP, Supplier=Mouser, Supplier réf=71-CRCW0805220RFKEAH
R20: "Thick Film Resistors - SMD 1/16watt 1.37Kohms 1%", Mfr="Vishay Dale", Mfr Réf=CRCW04021K37FKED, Price=0.093$, Supplier=mouser, Supplier réf=71-CRCW0402-1.37K-E3
R26: "Thick Film Resistors - SMD 1/16watt 60.4Kohms 1%", Mfr=Vishay-Dale, Mfr Réf=CRCW040260K4FKED, Price=0.10$, Supplier=Digikey, Supplier réf=541-60.4KLDKR-ND
R27: "Thin Film Resistors - SMD 1/8W 30.5K Ohms 0.1%", Mfr=YAGEO, Mfr Réf=RT0805BRD0730K5L, Price=0.15$, Supplier=Mouser, Supplier réf=603-RT0805BRD0730K5L
R28: "Thick Film Resistors - SMD 10 kOhms 50mW 0201 1%", Mfr=YAGEO, Mfr Réf=RC0201FR-0710KL, Price=0.09$, Supplier=mouser, Supplier réf=603-RC0201FR-0710KL
R30 R31 R32 R33 R34: "Thick Film Resistors - SMD ResHighPowerA 0805 10k 1% 1/2W TC100", Mfr=Bourns, Mfr Réf=CMP0805AFX-1002ELF, Supplier=Mouser, Supplier réf=652-CMP0805AFX-1002L
R35 R36 R37 R38 R39: "Thick Film Resistors - SMD 1/2watt 220ohms 1% High Power AEC-Q200", Mfr="Vishay / Dale", Mfr Réf=CRCW0805220RFKEAHP, Supplier=Mouser, Supplier réf=71-CRCW0805220RFKEAH
R50: library part res0.4
R51 R52: library part "res 1k"
R54: Mfr=YAGEO, Mfr Réf=AC0603JR-077K5L, Supplier=DigiKey, Supplier réf=13-AC0603JR-077K5LDKR-ND
U4: "Motor/Motion/Ignition Controllers & Drivers AUTOMOTIVE SIX CHANNEL LOW SIDE MOSFET PRE-DRIVER", Mfr="Mfr.:Allegro MicroSystems", Mfr Réf=A3944KLPTR-T, Price=2.67$, Supplier=Mouser, Supplier réf=250-A3944KLPTR-T
U5: "Switching Voltage Regulators 5A 40V Wide In Range DC-DC Converter", Mfr="Texas Instruments", Mfr Réf=TPS55340RTER, Price=15$, Supplier réf=595-TPS55340RTER
U7: library part USB, "USB - micro B USB 2.0 Receptacle Connector 5 Position Surface Mount, Right Angle", Mfr="Amphenol ICC (FCI)", Mfr Réf=10104110-0001LF, Price=$0.84, Supplier=DigiKey, Supplier réf=609-4052-6-ND

## Free pads (board coordinates)
  round 3 hole 2.1: 2(28.092,53.34) 2(29.413,141.681) 2(78.207,141.986) 2(81.051,53.34)

## Via types
v1: diameter 0.4, hole 0.2, Top Layer to Bottom Layer, 103 vias

## Nets (pads, with @x,y where several pads share a name; then routed paths per layer and width w, separated by ;. In a path a pad name is that pad's centre, name@x,y a point inside that pad or via, vN(x,y) a via of type N, cw(c..) or ccw(c..) an arc to the next point about the centre after c; other vN are vias at no path point)
5V_OUT: C14.1 C30.1 C31.1 C32.1 D1.2 D2.2 D3.2 D4.2 D5.2 D6.1 P2.19 P3.14 R6.1 R9.1 R17.2 R18.2 R21.1 R22.1 R24.1 R27.1 R30.2 R31.2 R32.2 R33.2 R34.2 U4.1 U4.15 U4.28 | length 38.8
  Top Layer w0.154: R33.2 R33.2@40.55,89.935 ; 51.351,115.096 51.359,115.087
  Top Layer w0.3: D1.2 65.994,78.071 65.744,77.821 65.744,77.646 65.71,77.612 65.71,76.2 66.853,75.057 73.254,75.057 v1(76.378,71.933) ; C30.1 80.501,67.285 80.873,66.914 80.873,66.789 80.898,66.764 C32.1 81.148,66.764 81.173,66.789 C31.1 ; v1(80.213,62.713) 81.064,63.564 82.169,63.564 ; 82.144,63.539 82.169,63.564 ; 82.424,63.538 82.399,63.564 82.274,63.564 82.169,63.564
  Top Layer w1: 51.351,115.096 R27.1
  Bottom Layer w0.3: v1(76.378,71.933) 80.213,68.097 v1(80.213,62.713)
A3944_2_SPI2_MISO: P1.8 P3.2 P3.6 P4.3 U4.26 | length 67.4
  Top Layer w0.154: 38.811,102.41 40.363,102.41 41.859,100.914 41.859,89.51 43.923,87.446 U4.26
  Bottom Layer w0.154: 35.78,102.41 33.045,105.145 33.045,122.707 36.754,126.416 46.279,126.416 50.02,130.157 50.02,135.532
A3944_2_SPI2_MOSI: P1.2 P3.3 P3.9 P4.2 U4.24 | length 118.3
  Top Layer w0.154: v1(43.994,74.61) 39.926,72.032 39.853,71.958 39.853,71.894 39.853,54.432 42.494,51.791 53.504,51.791 55.082,53.369 55.082,54.421 55.093,54.432 ; v1(45.262,88.653) 45.309,88.7 46.356,88.7 U4.24
  Bottom Layer w0.154: 35.78,117.65 35.804,117.626 43.308,117.626 43.332,117.602 ; v1(43.994,74.61) 43.994,75.992 45.539,77.536 45.539,88.321 45.262,88.598 v1(45.262,88.653) 45.517,88.908 45.517,115.418 43.332,117.602 ; 52.56,135.532 52.459,135.431 52.459,122.385 48.762,118.689 44.419,118.689 43.332,117.602
A3944_2_SPI2_SCK: P1.9 P3.5 P3.8 P4.4 U4.25 | length 57.6
  Top Layer w0.154: v1(45.994,111.531) 42.813,108.351 42.813,90.207 44.912,88.108 U4.25 ; v1(46.076,118.059) 48.133,118.059 50.574,120.5 50.574,123.561 50.902,123.889 50.902,132.537 49.327,134.112 47.943,134.112 47.379,134.677 47.379,135.825 ; 47.276,135.142 47.276,135.812
  Bottom Layer w0.154: v1(45.994,111.531) 46.035,111.572 46.035,118.018 v1(46.076,118.059)
EN: B1.2 LED1.C P2.2 R17.1 | length 27
  Top Layer w0.154: R17.1 59.7,69.95 61.655,71.905 62.857,71.905 62.882,71.93 73.697,71.93 74.228,71.399 LED1.C ; B1.2@81.661,74.128 B1.2
  Top Layer w0.45: B1.2@81.661,74.128 82.169,73.62 LED1.C
GND: B1.1 B1.3 B1.4 C2.2 C4.2 C5.2 C6.2 C7.2 C8.2 C9.2 C10.2 C11.2 C12.1 C13.2 C14.2 C20.1 C21.1 C30.2 C31.2 C32.2 J1.1 J2.1 J3.1 J4.1 J5.1 J6.1 J7.1 J8.1 J9.1 J10.1 J12.1 P1.1 P1.7 P2.14 P3.13 Q1.3 Q2.3 Q3.3 Q4.3 Q5.3 R26.2 R28.2 R53.1 U4.16 U4.17 U4.18 U4.19 U4.20 U4.21 U4.22 U5.6 U5.10 U5.11 U5.12 U5.13 U5.14 U5.17 U6.1 U6.3 U6.9 U7.5 U7.SH1 U7.SH2 U7.SH3 U7.SH4 | length 40.7
  Top Layer w0.154: v1(45.517,124.333) 45.669,124.485 U5.17@45.822,124.485 ; U5.6 45.724,124.388 U5.17@45.822,124.485 ; U5.17 U5.17@45.822,124.485 ; U5.14 46.224,124.997 v1(46.304,124.917) ; U4.21@46.411,90.739 45.473,90.739 ; U4.22 45.825,90.092 45.677,90.24 45.677,90.536 45.473,90.739 ; U4.20 45.158,91.415 45.067,91.506 ; U4.19 45.158,92.077 45,91.919 ; U4.18 45.158,92.738 45,92.896 ; U4.17 45.158,93.4 45,93.242 45,92.896 ; C5.2@67.659,93.425 68.521,94.287 70.101,94.287 70.557,93.832 73.19,93.832 73.538,94.18 Q2.3 ; C4.2 67.741,82.717 68.724,83.7 73.671,83.7 Q1.3 ; C6.2 67.741,104.12 68.371,104.75 68.513,104.75 68.746,104.982 73.773,104.982 Q3.3 ; C7.2 67.741,114.86 68.603,115.722 73.759,115.722 Q4.3 ; 45,91.919 45,92.896 ; 45,91.919 45,91.573 45.067,91.506 ; 45.067,91.506 45.067,91.145 45.473,90.739
  other v1: 57.035,84.877 59.22,86.421 57.252,86.766 66.751,95.86 68.631,95.91 68.656,107.747 64.059,107.925 64.304,110.134 68.758,117.932 46.304,124.333 45.568,124.943 48.057,126.67
GP35: P2.6 R52.2 U6.7 | length 30.1
  Top Layer w0.154: 62.55,82.09 63.932,80.708 v1(63.932,79.223) ; v1(69.788,70.575) 70.276,71.064 74.063,71.064 74.73,70.396 75.239,70.396 75.662,69.973 75.662,69.523 75.37,69.232 v1(74.854,69.232) ; U6.7 74.816,62.051 74.816,65.705 v1(74.828,65.718)
  Bottom Layer w0.154: v1(63.932,79.223) 63.932,76.022 69.357,70.597 69.766,70.597 v1(69.788,70.575) ; v1(74.828,65.718) 74.841,65.731 74.841,69.219 v1(74.854,69.232) 74.879,69.207 v1@74.879,69.063
NetC2_1: C2.1 U4.14 | length 30.9
  Top Layer w0.45: U4.14 54.172,94.723 55.855,93.04 55.855,79.498 62.201,73.152 66.345,73.152 C2.1
NetC11_1: C11.1 R20.2 | length 1.7
  Top Layer w0.154: R20.2 43.983,121.691 C11.1
NetC12_2: C12.2 R20.1 U5.7 | length 2.9
  Top Layer w0.154: R20.1 46.224,121.691 U5.7
NetC13_1: C13.1 U5.4 | length 1.5
  Top Layer w0.154: C13.1@43.275,123.708 C13.1 cw(c43.265,123.803) 43.265,123.888 U5.4
NetC20_2: C20.2 R50.2 R51.1 R52.1 U6.4 U6.8 | length 34.1
  Top Layer w0.154: U6.4 72.271,57.08 72.271,55.872 v1(72.568,55.575) v1@72.644,55.575 ; R51.1 73.769,66.195 75.026,66.195 75.183,66.038 76.096,66.038 76.101,66.042 78.376,66.042 C20.2 78.437,65.986 79.429,65.986 79.711,65.704 79.711,62.667 79.081,62.038 U6.8 76.073,61.353 76.123,61.303 78.267,61.303 78.715,60.855 v1(78.715,55.347) ; R51.1@73.612,66.038 73.685,66.111 73.685,69.672 R52.1
  Bottom Layer w0.154: v1(72.568,55.575) 72.796,55.347 v1(78.715,55.347)
NetC21_2: C21.2 J12.2 R54.2 U6.5 | length 64.6
  Top Layer w0.154: J12.2 32.829,76.429 33.471,75.787 47.079,75.787 51.273,71.594 51.273,66.093 52.837,64.53 61.258,64.53 62.637,65.908 67.204,65.908 ; R54.2 68.267,68.562 69.836,66.993 69.836,65.859 C21.2@70.269,65.426 ; C21.2 C21.2@70.269,65.426 ; U6.5 72.21,62.091 67.616,62.091 67.204,62.502 67.204,65.908 ; 67.204,65.908 67.274,65.908 67.756,65.426 C21.2@70.269,65.426
NetD6_2: D6.2 L1.2 U5.1 U5.15 U5.16
NetJ1_2: J1.2 P1.16 R30.1 | length 60
  Top Layer w0.154: J1.2 31.844,117.899 32.461,118.516 38.009,118.516 ; 35.78,82.09 36.672,82.982 v1(38.989,82.982) ; 39.581,118.298 39.961,118.677 41.571,118.677 41.58,118.669 43.231,118.669 44.882,117.018 v1(47.269,117.018) ; v1(44.814,94.472) 44.861,94.519 44.861,94.601 45.563,95.303 46.256,95.303 v1(47.523,96.571)
  Bottom Layer w0.154: v1(38.989,82.982) 44.785,88.778 44.785,94.443 v1(44.814,94.472) ; v1(47.269,117.018) 46.513,116.261 46.513,97.581 v1(47.523,96.571)
NetJ2_2: J2.2 P2.12 R31.1 | length 50.2
  Top Layer w0.154: J2.2 29.091,112.199 30.969,114.078 33.031,114.078 ; 33.032,114.079 36.274,114.079 37.305,115.11 R31.1 38.65,115.335 39.073,115.758 39.581,115.758 39.935,116.112 47.752,116.112 49.175,114.689 49.573,114.689 v1(49.606,114.656) ; v1(57.252,99.492) 60.388,99.492 62.55,97.33
  Bottom Layer w0.154: v1(49.606,114.656) 50.306,114.656 57.252,107.71 v1(57.252,99.492)
NetJ3_2: J3.2 P1.15 R32.1 | length 39.3
  Top Layer w0.154: 35.78,84.63 34.504,83.354 28.603,83.354 27.051,84.906 27.051,99.306 J3.2 34.204,106.459 36.207,106.459 37.238,107.49 R32.1
NetJ4_2: J4.2 P1.13 R33.1 | length 10.9
  Top Layer w0.154: J4.2 32.647,92.829 35.766,89.71 35.78,89.71 R33.1
NetJ5_2: J5.2 P1.14 R34.1 | length 10.7
  Top Layer w0.154: J5.2 31.959,84.531 34.598,87.17 35.78,87.17 R34.1
NetJ6_2: J6.2 R35.1 | length 15.3
  Top Layer w0.45: R35.1@73.448,78.05 R35.1 73.173,81.453 75.616,83.896 75.616,86.258 J6.2
NetJ7_2: J7.2 R36.1 | length 15.3
  Top Layer w0.45: R36.1 74.393,88.719 75.463,89.789 75.463,97.665 76.478,98.679 J7.2
NetJ8_2: J8.2 R37.1 | length 11.3
  Top Layer w0.45: R37.1 73.173,102.357 77.869,107.053 J8.2
NetJ9_2: J9.2 R38.1 | length 10.4
  Top Layer w0.154: R38.1 R38.1@73.173,110.425
  Top Layer w0.45: R38.1 73.173,112.822 75.768,115.418 J9.2
NetJ10_2: J10.2 R39.1 | length 7.9
  Top Layer w0.254: R39.1 R39.1@73.143,121.18
  Top Layer w0.45: R39.1@73.143,121.18 75.991,124.028 J10.2
NetLED1_A: LED1.A R18.1 | length 34
  Top Layer w0.154: R18.1 53.95,71.725 55.295,70.38 55.902,70.38 v1(55.931,70.409) ; v1(77.591,68.199) 81.969,68.199 LED1.A
  Bottom Layer w0.154: v1(55.931,70.409) 58.199,70.409 60.587,68.021 71.12,68.021 74.289,64.852 76.263,64.852 77.591,66.18 v1(77.591,68.199)
NetP1_3: P1.3 P4.1
NetP1_6: P1.6 P3.10
NetP1_10: P1.10 U4.23
NetP2_5: P2.5 P3.11
NetP2_7: P2.7 P3.1
NetP2_8: P2.8 P3.4
NetP2_9: P2.9 U4.27 | length 20.5
  Top Layer w0.254: U4.27 v1@47.856,86.785 ; v1(56.49,84.627) 56.48,84.637 56.48,87.028 59.162,89.71 62.55,89.71
  Bottom Layer w0.254: v1(47.865,86.794) 49.443,85.217 55.88,85.217 56.47,84.627 v1(56.49,84.627)
NetP2_11: P2.11 R54.1
NetP2_13: P2.13 P3.12
NetP2_15: P2.15 R40.2
NetP3_7: P3.7 R40.1 | length 3.5
  Top Layer w0.154: R40.1 48.26,56.326 49.886,54.7
NetQ1_1: Q1.1 R7.1 | length 1.9
  Top Layer w0.154: R7.1 70.125,84.501 Q1.1
NetQ2_1: Q2.1 R8.1 | length 2
  Top Layer w0.154: R8.1 69.79,95.13 Q2.1
NetQ3_1: Q3.1 R10.1 | length 2
  Top Layer w0.154: R10.1 69.872,105.886 Q3.1
NetQ4_1: Q4.1 R23.1 | length 2
  Top Layer w0.154: R23.1 69.72,117.034 70.143,116.611 Q4.1
NetQ5_1: Q5.1 R25.1 | length 1.9
  Top Layer w0.154: R25.1 70.017,127.51 Q5.1
NetR1_1: R1.1 U4.3 | length 20.2
  Top Layer w0.154: U4.3 v1(53.65,87.446) ; R1.1 v1(70.819,86.509)
  Bottom Layer w0.154: v1(53.65,87.446) 58.452,87.446 ; 58.453,87.446 59.493,87.446 60.225,86.714 60.229,86.71 60.23,86.709 61.064,85.875 70.185,85.875 v1(70.819,86.509)
NetR2_1: R2.1 U4.5 | length 24.1
  Top Layer w0.154: U4.5 v1(53.65,88.769) ; v1(66.116,93.015) 66.116,97.485 66.751,98.12 68.143,98.12 68.639,97.624 69.147,97.624 69.57,97.201 R2.1
  Bottom Layer w0.154: v1(53.65,88.769) 55.244,88.769 57.483,91.008 64.11,91.008 v1(66.116,93.015)
NetR3_1: R3.1 U4.7 | length 30.4
  Top Layer w0.154: U4.7 v1(53.65,90.092) ; v1(66.319,103.607) 66.319,104.395 67.029,105.104 68.224,105.104 68.367,105.104 68.702,105.439 68.702,106.773 69.037,107.108 69.229,107.108 69.652,107.531 R3.1
  Bottom Layer w0.154: v1(53.65,90.092) 54.96,90.092 57.23,92.362 58.148,92.362 60.025,94.239 60.025,102.225 61.432,103.632 66.294,103.632 v1(66.319,103.607)
NetR4_1: R4.1 U4.9 | length 39.2
  Top Layer w0.154: U4.9 v1(53.65,91.415) ; R4.1 v1(70.795,118.7)
  Bottom Layer w0.154: v1(53.65,91.415) 54.864,91.415 56.814,93.366 57.64,93.366 58.733,94.459 58.733,105.208 62.523,108.999 64.999,108.999 68.25,112.25 68.25,116.155 v1(70.795,118.7)
NetR5_1: R5.1 U4.11 | length 47.4
  Top Layer w0.154: U4.11 52.58,92.744 53.644,92.744 v1(53.649,92.749) ; R5.1 69.739,129.415 v1(70.814,129.415)
  Bottom Layer w0.154: v1(53.649,92.749) 57.729,96.828 57.729,109.207 62.123,113.601 63.451,113.601 64.95,115.1 64.95,124.7 69.665,129.415 v1(70.814,129.415)
NetR26_1: R26.1 U5.9 | length 1.9
  Top Layer w0.154: U5.9 R26.1@49.327,123.888
NetR27_2: R27.2 R28.1 U5.8 | length 4.1
  Top Layer w0.154: R28.1 49.428,122.784 R27.2
  Top Layer w0.2: U5.8@46.761,123.139 49.042,123.139 49.069,123.112 49.159,123.112 49.224,123.047 R27.2@49.224,123.012
NetR50_1: R50.1 U7.1 | length 15.4
  Top Layer w0.154: v1(75.997,63.602) 75.997,63.668 v1@76.098,63.77
  Top Layer w0.45: v1(70.942,60.147) 70.942,54.94 71.851,54.031 U7.1 ; v1@76.098,63.77 R50.1
  Bottom Layer w0.45: v1(70.942,60.147) 70.942,61.29 73.254,63.602 v1(75.997,63.602)
NetR51_2: R51.2 U6.6 | length 1.9
  Top Layer w0.5: U6.6 73.546,62.051 73.546,63.868 R51.2@73.558,63.881
NetR53_2: R53.2 U6.2 | length 5.2
  Top Layer w0.154: U6.2 74.803,55.916 74.893,55.826 77.213,55.826 77.544,56.157 R53.2
out1: C4.1 D1.1 Q1.2 R6.2 R35.2 U4.2 | length 22.8
  Top Layer w0.45: U4.2 v1(54.572,86.785) ; v1(68.019,78.071) 68.315,78.071 D1.1
  Bottom Layer w0.45: v1(54.083,86.785) v1(54.572,86.785) 56.349,86.785 57.338,85.796 59.36,85.796 59.38,85.817 59.898,85.817 61.071,84.644 61.071,81.902 62.124,80.848 65.243,80.848 v1(68.019,78.071)
  other v1: 68.019,78.071
out1_1: R1.2 R7.2 | length 3.3
  Top Layer w0.154: R7.2 R1.2
  Top Layer w0.3: R7.2 R1.2
out2: C5.1 D2.1 Q2.2 R9.2 R36.2 U4.4 | length 17.8
  Top Layer w0.154: Q2.2@71.392,93.275 Q2.2
  Top Layer w0.45: U4.4 v1(54.083,88.108) ; v1(54.083,88.108) v1(54.572,88.108) ; v1(67.937,88.78) v1(68.512,88.78) 68.955,88.78
  Bottom Layer w0.45: v1(54.083,88.108) 54.657,88.108 55.293,88.108 55.576,88.392 65.1,88.392 65.488,88.78 v1(67.937,88.78) v1(68.512,88.78)
out2_2: R2.2 R8.2 | length 1.8
  Top Layer w0.154: R8.2@67.57,95.45 R8.2
  Top Layer w0.3: R8.2 R2.2
out3: C6.1 D3.1 Q3.2 R21.2 R37.2 U4.6 | length 26
  Top Layer w0.45: U4.6 v1(54.572,89.431) ; 69.037,99.475 69.037,99.026 v1(69.473,98.591) ; v1@69.481,98.591 v1(70.047,98.591)
  Bottom Layer w0.45: v1@54.083,89.431 54.658,89.431 55.195,89.431 57.382,91.618 59.207,91.618 60.925,93.335 60.925,97.7 61.825,98.6 69.464,98.6 v1(69.473,98.591) v1(70.047,98.591)
  other v1: 54.083,89.431
out3_3: R3.2 R10.2 | length 3.3
  Top Layer w0.154: R10.2 R3.2
  Top Layer w0.3: R10.2 R3.2
out4: C7.1 D4.1 Q4.2 R22.2 R38.2 U4.8 | length 32.4
  Top Layer w0.154: v1(68.594,110.2) D4.1 ; C7.1@69.124,114.35 C7.1
  Top Layer w0.45: U4.8 v1(54.572,90.754)
  Bottom Layer w0.45: v1(54.083,90.754) v1(54.572,90.754) 54.912,90.754 57.022,92.864 57.848,92.864 59.235,94.251 59.235,105 60.409,106.175 63.994,106.175 v1(68.019,110.2) v1(68.594,110.2)
out4_4: R4.2 R23.2 | length 3.3
  Top Layer w0.154: R23.2 R4.2
  Top Layer w0.3: R23.2 R4.2
out5: C8.1 D5.1 Q5.2 R24.2 R39.2 U4.10 | length 41.7
  Top Layer w0.45: U4.10@52.572,92.077 v1(54.569,92.077) ; U4.10 v1(54.08,92.077) ; v1(68.564,121.082) 69.007,121.082
  Bottom Layer w0.45: v1(54.08,92.077) 54.572,92.077 54.655,92.077 56.445,93.868 57.432,93.868 58.231,94.667 58.231,105.416 58.326,105.511 58.326,107.473 62.128,111.275 64.625,111.275 66.775,113.425 66.775,119.868 67.989,121.082 v1(68.564,121.082)
out5_5: R5.2 R25.2 | length 3.3
  Top Layer w0.154: R25.2 R5.2 R5.2@67.828,129.426
  Top Layer w0.3: R25.2 R5.2
Vbat: C9.1 C10.1 L1.1 U5.2 U5.3 | length 134
  Top Layer w0.3: U5.3 43.787,124.388 43.688,124.487 43.688,124.888 U5.2
  Top Layer w0.5: 43.688,124.888 41.351,124.888 37.372,124.888 32.88,120.396 28.372,120.396 26.05,118.074 26.05,72.375 28.139,70.286 32.421,70.286 35.269,73.134 37.549,73.134 39.675,75.26 46.507,75.26 46.654,75.114 48.868,72.9 v1(48.868,64.322)
  Bottom Layer w0.5: 59.85,65.057 49.602,65.057 v1(48.868,64.322) 59.249,64.322 61.417,62.154 63.932,62.154 65.507,63.729 v1(66.472,63.729)
  other v1: 69.088,64.084 68.047,64.135
pads on no net: P1.4 P1.5 P1.11 P1.12 P1.17 P1.18 P1.19 P1.20 P1.21 P1.22 P1.23 P1.24 P1.25 P1.26 P1.27 P1.28 P1.29 P1.30 P1.31 P1.32 P1.33 P1.34 P1.35 P1.36 P1.37 P1.38 P1.39 P1.40 P1.41 P1.42 P2.1 P2.3 P2.4 P2.10 P2.16 P2.17 P2.18 P2.20 P2.21 P2.22 P2.23 P2.24 P2.25 P2.26 P2.27 P2.28 P2.29 P2.30 P2.31 P2.32 P2.33 P2.34 P2.35 P2.36 P2.37 P2.38 P2.39 P2.40 P2.41 P2.42 U4.12 U4.13 U4.29 U5.5 U7.2 U7.3 U7.4
copper on no net: | length 800.6
  Top Layer w0.154: 34.773,54.432 34.569,54.635 34.569,61.595 38.025,65.051 38.426,65.051 v1(38.456,65.081) ; v1(37.998,83.896) 39.624,85.522 39.624,100.051 v1(38.176,101.498) ; v1(39.482,114.162) 39.881,114.162 39.935,114.108 41.471,114.108 42.171,114.808 v1(46.99,114.808) ; 42.266,54.7 42.266,55.062 41.123,56.206 41.123,69.026 v1(44.096,72) ; v1(43.29,97.46) 43.29,91.584 45.443,89.431 46.425,89.431 ; v1(43.815,63.703) 43.815,62.306 46.584,59.538 48.184,59.538 48.26,59.461 ; v1(44.653,69.596) 42.443,67.386 42.443,57.062 44.806,54.7 ; 44.831,54.7 44.831,54.534 45.222,54.143 45.222,53.406 45.999,52.629 51.587,52.629 52.418,53.459 52.418,54.297 52.553,54.432 ; v1(50.196,67.818) 50.242,67.772 50.242,61.834 57.351,54.725 57.532,54.725 ; v1(51.918,66.751) 51.965,66.704 52.102,66.704 52.131,66.675 56.367,66.675 58.577,68.885 58.577,74.976 v1(57.633,75.921) ; 54.999,135.825 77.256,135.825 81.483,131.597 81.483,84.718 73.788,77.022 73.771,77.022 73.101,76.352 67.335,76.352 v1(66.573,77.114) ; v1(59.037,83.011) 60.931,83.011 62.55,84.63 ; v1(59.461,84.15) 59.528,84.15 59.644,84.267 59.647,84.267 62.55,87.17 ; 62.55,94.79 64.344,94.79 64.722,94.412 v1(64.722,73.777) ; 62.55,115.11 62.916,115.11 63.252,115.446 63.299,115.446 ; v1@64.926,67.548 v1(64.922,67.544) 64.922,68.309 66.627,70.013 66.627,70.083 ; v1(66.853,61.436) 66.853,59.665 v1(69.139,57.379) ; v1(69.015,62.568) 70.684,62.568 72.06,63.943 72.06,70.206 v1(71.679,70.587) ; v1(70.644,101.524) 70.691,101.477 70.888,101.477 72.24,100.125 72.24,94.69 71.994,94.444 v1(71.994,94.406)
  Top Layer w0.4: 50.796,69.418 50.796,63.936 56.803,57.929 64.488,57.929 67.692,54.725
  Bottom Layer w0.154: 33.96,132.131 32.978,132.131 27.381,126.534 27.381,105.664 28.345,104.7 33.175,99.87 35.78,99.87 ; 35.78,97.33 36.146,97.33 36.644,96.832 42.662,96.832 v1(43.29,97.46) ; 35.78,107.49 38.176,105.094 v1(38.176,101.498) ; 35.78,115.11 38.534,115.11 v1(39.482,114.162) ; 37.039,54.705 37.313,54.432 37.313,51.994 38.049,51.257 46.533,51.257 47.265,51.99 47.265,54.225 47.473,54.432 ; 37.212,54.725 37.212,55.93 25.877,67.265 25.877,126.182 33.35,133.655 47.748,133.655 49.919,135.825 ; v1(37.998,83.896) 37.998,82.728 v1(38.636,82.09) 38.636,73.988 44.806,67.818 v1(50.196,67.818) ; v1(38.456,65.081) 40.126,66.751 v1(51.918,66.751) ; v1(43.815,63.703) 57.023,63.703 59.29,61.436 v1(66.853,61.436) ; v1(44.096,72) 44.096,73.188 55.059,84.15 v1(59.461,84.15) ; v1(46.99,114.808) 54.999,122.817 54.999,135.825 ; v1(57.633,75.921) 59.037,77.325 v1(59.037,83.011) ; 60.072,54.725 53.43,61.366 43.294,61.366 42.545,62.115 42.545,64.491 43.812,65.757 54.556,65.757 55.301,66.503 55.301,66.63 55.1,70.065 55.1,70.753 55.347,74.177 55.347,74.304 56.441,75.399 cw(c56.55,75.29) 56.55,75.444 58.444,75.444 62.55,79.55 ; 62.55,99.87 62.657,99.977 68.328,99.977 69.875,101.524 v1(70.644,101.524) ; 62.55,104.95 70.386,104.95 77.495,97.841 77.495,71.419 80.69,68.224 80.69,58.454 78.808,56.571 69.946,56.571 v1(69.139,57.379) ; 62.612,54.725 62.612,56.164 v1(69.015,62.568) ; v1(64.722,73.777) 66.376,72.123 66.421,72.078 66.421,71.951 66.331,71.86 62.814,70.933 cw(c62.55,71.93) 62.552,70.899 55.733,70.886 55.454,70.606 55.454,70.211 55.733,69.932 60.44,67.667 v1(64.922,67.544) ; v1(71.679,70.587) 71.679,82.151 71.45,82.38 71.45,93.878 71.978,94.406 v1(71.994,94.406)
  other v1: 48.611,88.772 50.389,88.772 48.611,89.915 50.389,89.915 48.611,91.185 50.389,91.185 48.611,92.328 50.389,92.328

## Polygon pours and split planes (outlines as drawn)
no net on Top Layer "NONET_L-01_P-001" (solid, pour order 101): 25.79,50.546 83.147,50.546 83.147,143.078 83.147,144.272 81.649,144.272 25.794,144.272 25.794,50.55 25.277,50.033
GND on Top Layer "NONET_L-01_P-001" (solid, remove dead copper, shelved, pour order 99): 87.127,144.165 25.289,144.165 25.289,50.058 25.619,50.388 86.845,50.388
no net on Top Layer "NONET_L-01_P-001" (solid, remove dead copper, pour order 63): 68.414,124.428 65.128,124.428 ccw(c65.128,124.05) 64.75,124.05 64.75,77.95 ccw(c65.3,77.95) 65.3,77.4 68.025,77.4 ccw(c68.025,77.775) 68.4,77.775 68.4,123.505 ccw(c67.477,123.505) 67.477,124.428
5V_OUT on Top Layer "NONET_L-01_P-001" (solid, remove dead copper, pour order 74): 53.594,72.949 53.594,86.385 41.123,86.385 41.123,113.64 63.83,113.64 63.83,116.281 41.834,116.281 41.834,119.101 32.258,119.101 32.258,83.795 49.987,83.795 49.987,68.351 59.205,68.351 59.205,72.949
no net on Top Layer "NONET_L-01_P-001" (solid, pour order 80): 45.263,94.488 45.263,101.778 65.481,101.778 65.481,97.231 48.235,97.231 48.235,94.488
Vbat on Top Layer "NONET_L-01_P-001" (solid, remove dead copper, pour order 79): 33.63,142.926 33.63,128.422 40.437,128.422 40.437,124.079 42.291,124.079 42.291,130.581 35.306,130.581 35.306,142.926
NetD6_2 on Top Layer "NONET_L-01_P-001" (solid, pour order 75): 45.898,125.628 45.898,128.092 50.394,128.092 50.394,132.41 46.025,132.41 46.025,141.935 44.018,141.935 44.018,125.197 44.983,125.197 44.983,125.628
5V_OUT on Top Layer "NONET_L-01_P-001" (solid, pour order 25): 53.645,133.68 53.645,124.333 53.721,124.257 50.851,124.257 50.851,120.523 56.464,120.523 56.464,125.857 58.064,127.457 58.064,133.731 53.619,133.731
5V_OUT on Top Layer "NONET_L-01_P-001" (solid, pour order 95): 57.15,132.309 57.404,132.055 57.404,126.187 56.896,126.187 56.871,125.984 56.871,125.857 56.871,120.726 50.444,120.726 50.444,120.929 50.444,121.082 50.444,124.739 53.137,124.739 53.797,125.4 53.797,132.359 57.099,132.359
no net on Top Layer "NONET_L01_P061" (solid, pour order 61): 66.452,124.453 66.477,124.428 68.477,124.428 68.477,122.228 68.027,121.778 66.952,121.778 66.952,120.378 66.802,120.228 65.352,120.228 65.352,122.628 66.452,123.728 66.452,124.428
no net on Top Layer "NONET_L01_P060" (solid, pour order 60): 66.482,113.57 66.507,113.545 68.507,113.545 68.507,111.345 68.057,110.895 66.982,110.895 66.982,109.495 66.832,109.345 65.382,109.345 65.382,111.745 66.482,112.845 66.482,113.545
no net on Top Layer "NONET_L01_P041" (solid, pour order 41): 65.475,102.625 65.5,102.65 68.525,102.65 68.525,100.5 68,99.975 66.825,99.975 66.825,98.625 66.525,98.325 66.475,98.375 65.45,98.375 65.45,102.625
out3 on Top Layer "NONET_L-01_P-001" (solid, pour order 28): 68.648,104.15 68.648,98.825 ccw(c69.148,98.825) 69.148,98.325 72.148,98.325 ccw(c72.148,98.375) 72.198,98.375 cw(c72.198,98.425) 72.148,98.425 72.148,104.95 ccw(c71.823,104.95) 71.823,105.275 68.874,105.275 ccw(c68.962,104.96) 68.648,104.872
out4 on Top Layer "NONET_L-01_P-001" (solid, pour order 27): 68.648,114.875 68.648,109.55 ccw(c69.148,109.55) 69.148,109.05 72.148,109.05 ccw(c72.148,109.1) 72.198,109.1 cw(c72.198,109.15) 72.148,109.15 72.148,115.675 ccw(c71.823,115.675) 71.823,116 68.874,116 ccw(c68.962,115.685) 68.648,115.597
out2 on Top Layer "NONET_L-01_P-001" (solid, pour order 32): 68.566,93.394 68.566,88.069 ccw(c69.066,88.069) 69.066,87.569 72.066,87.569 ccw(c72.066,87.619) 72.116,87.619 cw(c72.116,87.669) 72.066,87.669 72.066,94.194 ccw(c71.741,94.194) 71.741,94.519 68.792,94.519 ccw(c68.88,94.204) 68.566,94.116
no net on Top Layer "NONET_L-01_P-001" (solid, pour order 59): 68.5,81.425 68.5,78.9 68.275,78.675 67.05,78.675 67.05,77.45 66.975,77.425 66.825,77.4 65.3,77.4 65.3,79.3 67.5,81.5 67.6,81.4 68.45,81.4
no net on Top Layer "NONET_L01_P057" (solid, pour order 57): 66.4,92.15 66.425,92.125 68.425,92.125 68.425,89.925 67.975,89.475 66.9,89.475 66.9,88.075 66.75,87.925 65.3,87.925 65.3,90.325 66.4,91.425 66.4,92.125
out5 on Top Layer "NONET_L-01_P-001" (solid, pour order 26): 68.618,125.63 68.618,120.305 ccw(c69.118,120.305) 69.118,119.805 72.118,119.805 ccw(c72.118,119.855) 72.168,119.855 cw(c72.168,119.905) 72.118,119.905 72.118,126.43 ccw(c71.793,126.43) 71.793,126.755 68.844,126.755 ccw(c68.932,126.441) 68.618,126.353
out1 on Top Layer "NONET_L-01_P-001" (solid, pour order 33): 68.648,82.699 68.648,77.374 ccw(c69.148,77.374) 69.148,76.874 72.148,76.874 ccw(c72.148,76.924) 72.198,76.924 cw(c72.198,76.974) 72.148,76.974 72.148,83.499 ccw(c71.823,83.499) 71.823,83.824 68.874,83.824 ccw(c68.962,83.51) 68.648,83.422
GND on Bottom Layer "NONET_L-01_P-001" (solid, remove dead copper, pour order 100): 82.805,143.598 26.188,143.598 26.188,50.354 82.246,50.354 82.805,50.913
Vbat on Bottom Layer "NONET_L-01_P-001" (solid, pour order 91): 36.622,130.429 ccw(c36.622,130.124) 36.317,130.124 36.317,128.93 ccw(c36.698,128.93) 36.698,128.549 38.959,128.549 ccw(c38.959,128.803) 39.213,128.803 39.213,130.073 ccw(c38.857,130.073) 38.857,130.429
Vbat on Bottom Layer "NONET_L-01_P-001" (solid, pour order 44): 66.467,63.306 68.844,63.306 ccw(c68.844,63.645) 69.183,63.645 69.183,64.179 ccw(c68.853,64.179) 68.853,64.509 66.211,64.509 ccw(c66.211,64.28) 65.983,64.28 65.983,63.791 ccw(c66.467,63.791)

## Other copper
Top Layer:
  region: 27.809,125.046 27.879,125.004 27.914,124.955 28.04,124.829 28.054,124.731 28.04,124.436 28.005,124.401 27.977,124.387 27.9,124.31 27.886,124.282 27.683,124.191 27.501,124.205 27.374,124.261 27.304,124.303 27.269,124.338 27.143,124.604 27.157,124.731 27.213,124.815 27.269,124.913 27.29,124.934 27.318,124.948 27.43,125.06 27.529,125.074 27.795,125.06 27.802,125.053